# Altium PCB ife18_TS_AIL_Buck.PcbDoc
Units mm, origin at the board's own origin, x right, y up, seen from the top; angles counter-clockwise.
Board outline 32.3 x 21.59 mm, 2 copper layers (Top Layer, Bottom Layer); 12 components, 12 nets, 42 pads, 9 vias.
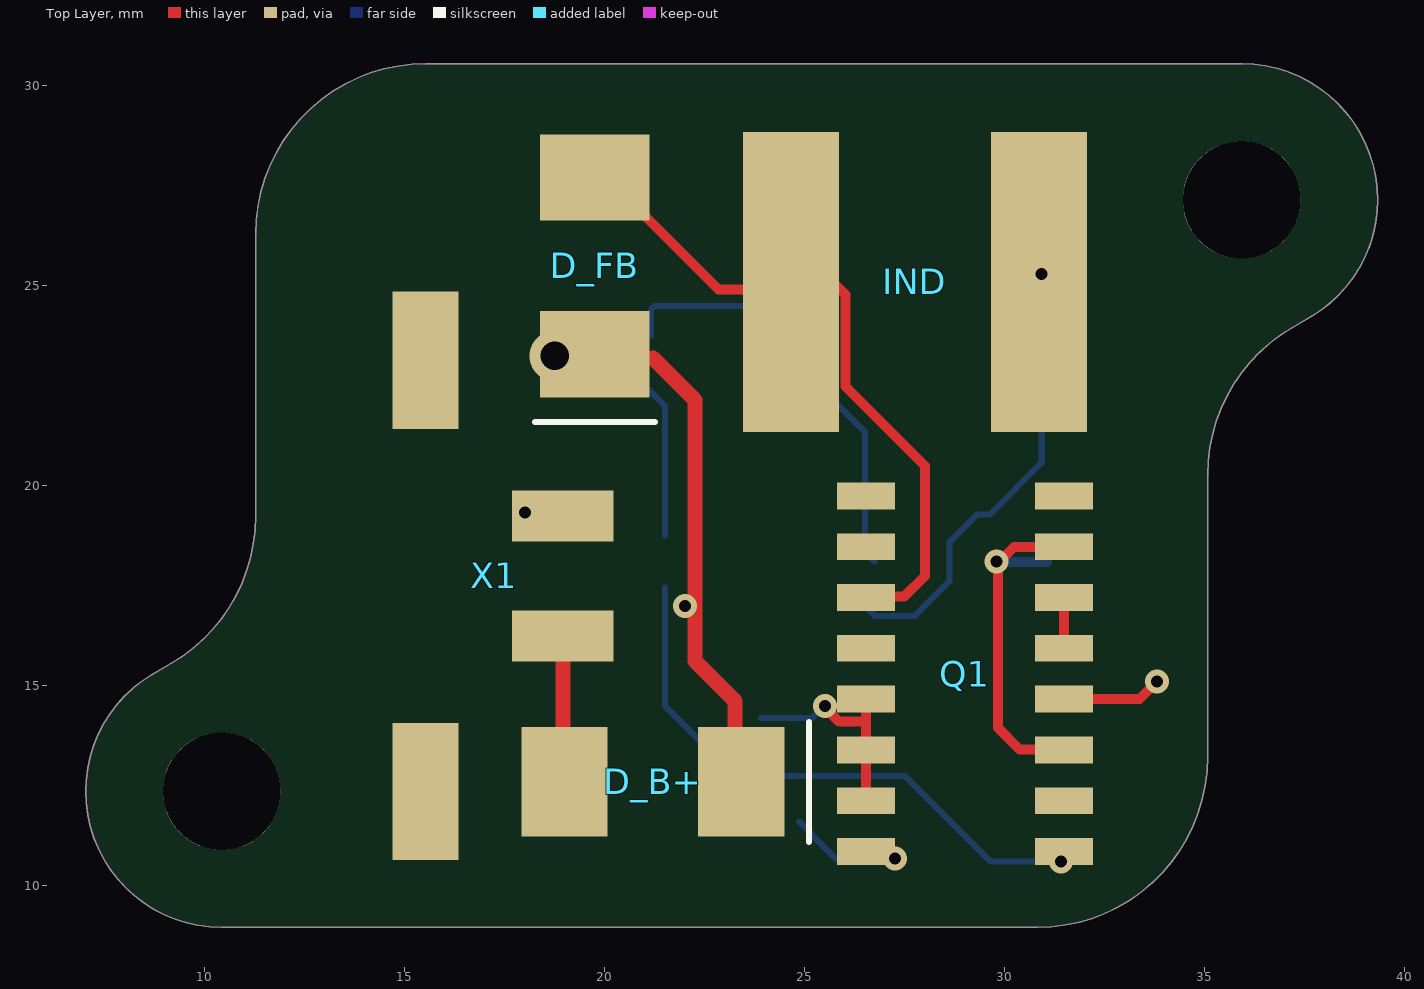
[diagram p0: Top Layer view]
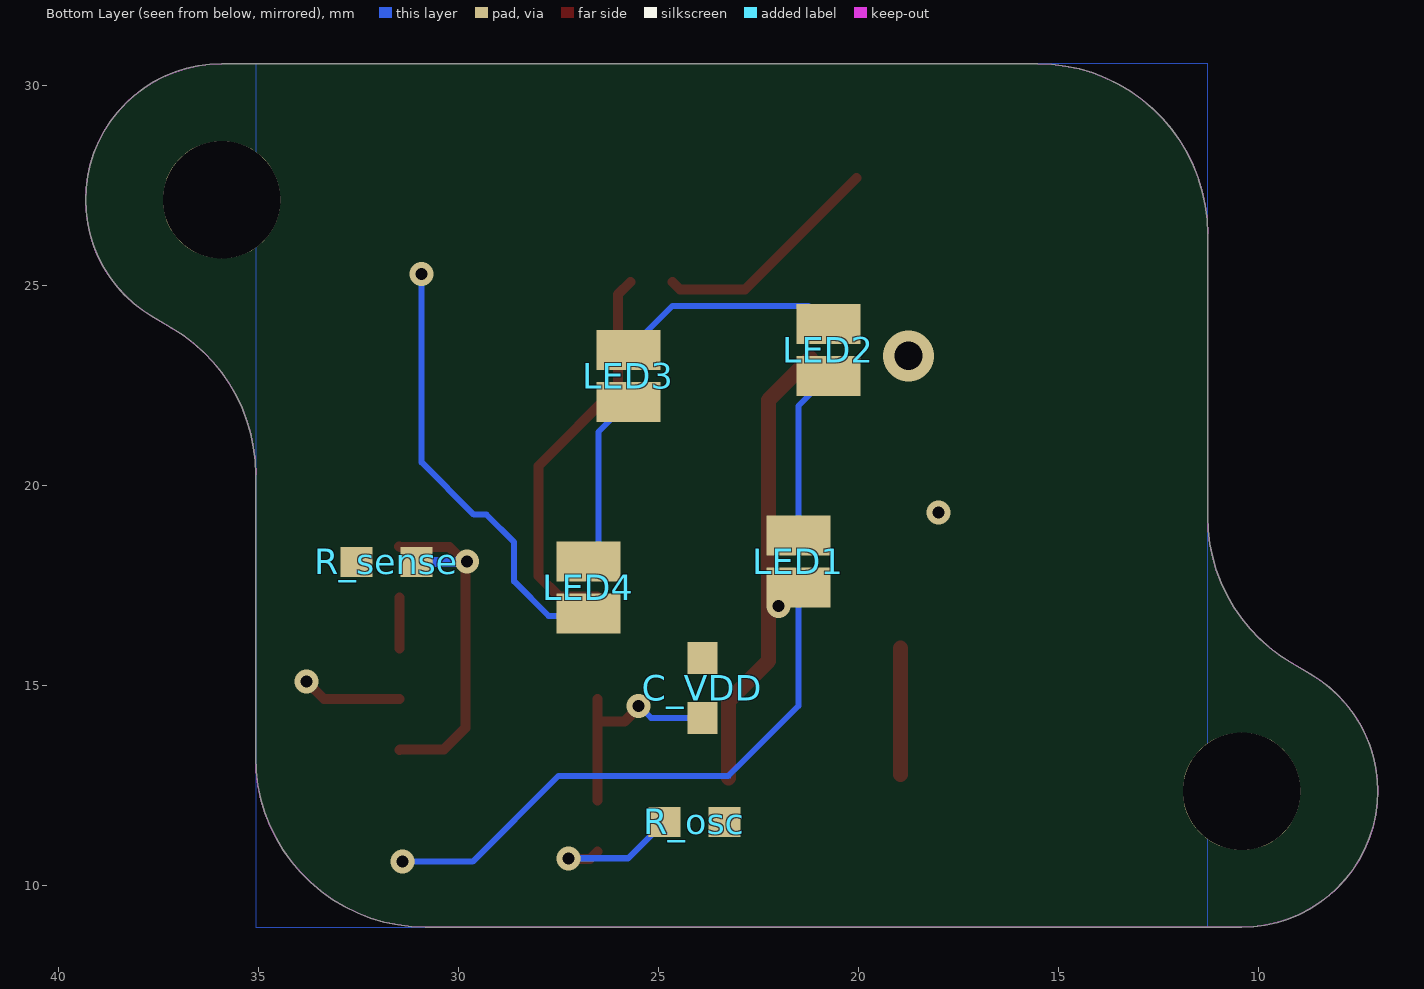
[diagram p1: Bottom Layer view, seen from below]
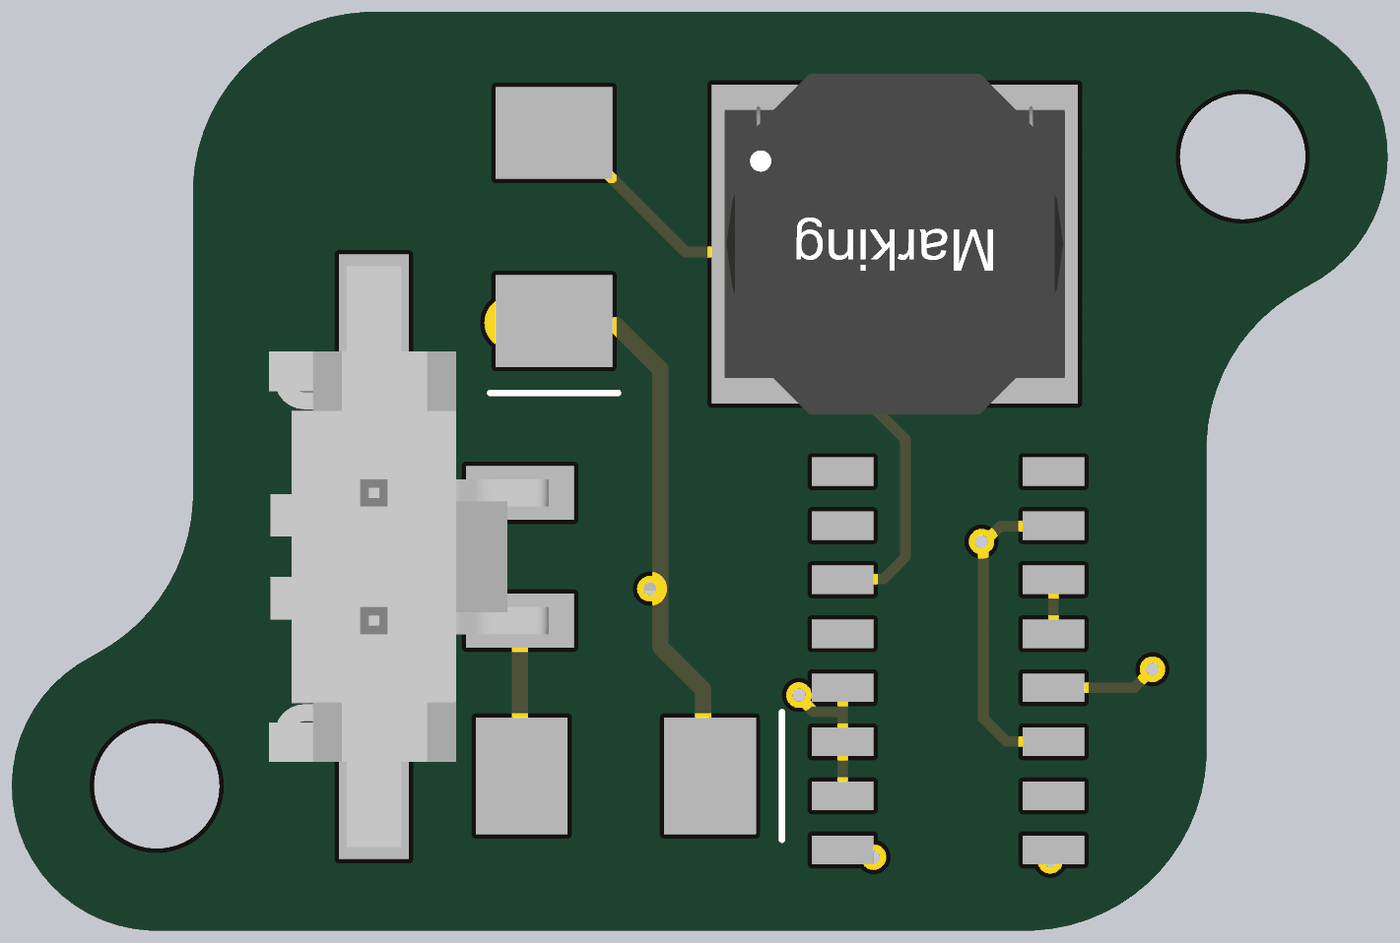
[diagram p2: 3D render of the assembled board from above, using the file's embedded part models]
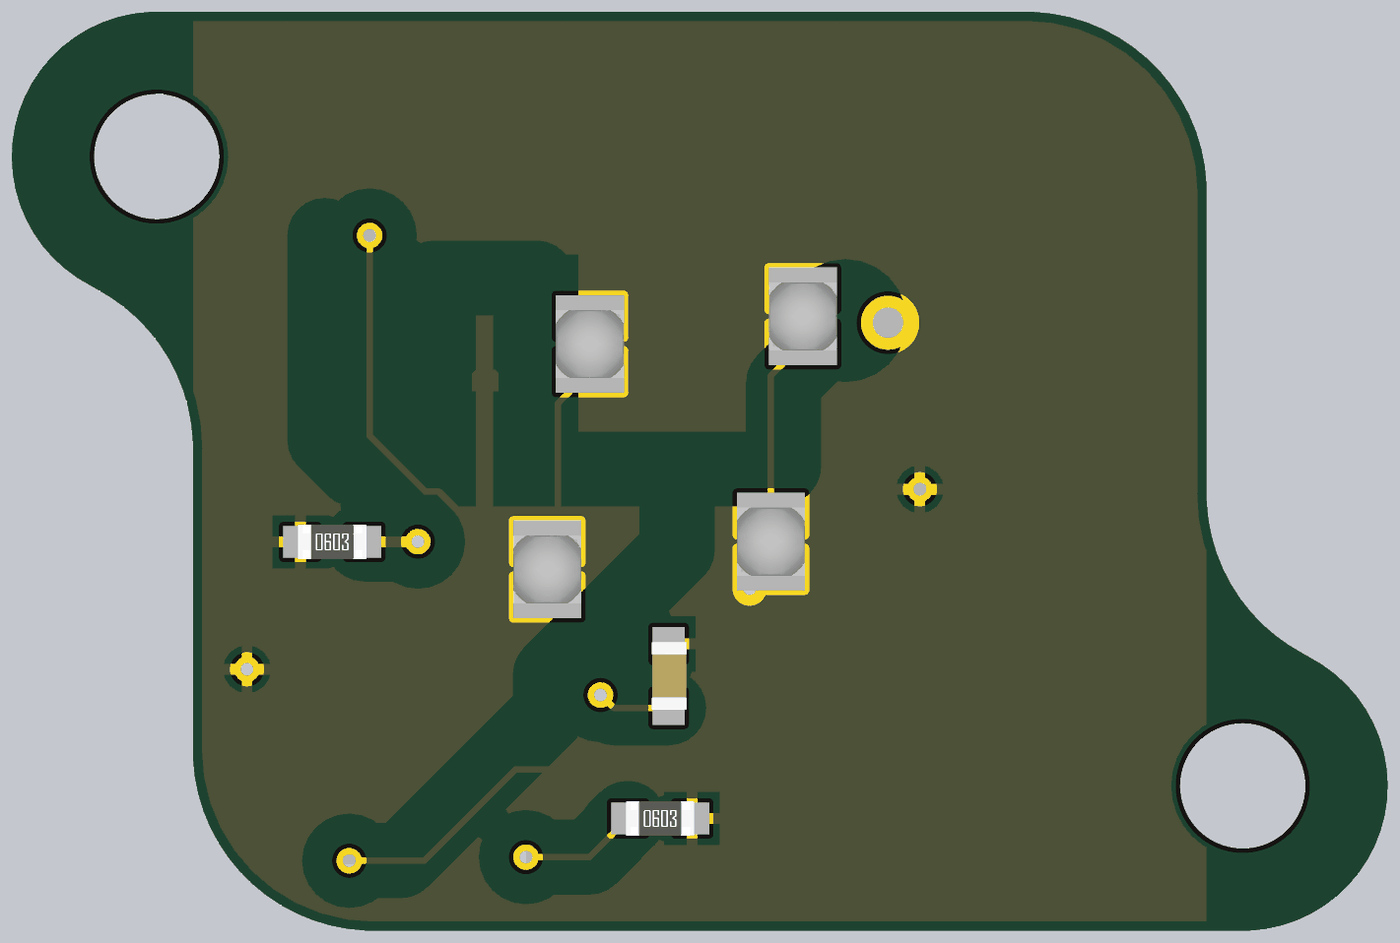
[diagram p3: 3D render of the assembled board from below, using the file's embedded part models]

## Layer stack, top to bottom
Top Solder: solder mask 0.0102, Solder Resist, Dk 3.5
Top Layer: signal copper 0.0356
Dielectric 1: dielectric 0.32, FR-4, Dk 4.8
Bottom Layer: signal copper 0.0356
Bottom Solder: solder mask 0.0102, Solder Resist, Dk 3.5

## Board outline
8.714,15.306 9.152,15.56 ccw(c7.02,19.236) 11.27,19.236 11.27,26.304 cw(c15.52,26.304) 15.52,30.554 35.92,30.554 cw(c35.92,27.154) 37.626,24.213 37.188,23.959 ccw(c39.32,20.283) 35.07,20.283 35.07,13.214 cw(c30.82,13.214) 30.82,8.964 10.42,8.964 cw(c10.42,12.364)

## Design rules (kind name [scope] priority, off if disabled: settings)
BoardOutlineClearance [All] p1: gap=0.2 ignorepadtopadclearanceinfootprint=FALSE
Clearance "Board Clearance" [(IsPad OR OnLayer('Keep-Out Layer'))] p1: gap=0.2 ignorepadtopadclearanceinfootprint=TRUE
Clearance [All] p2: gap=0.8 ignorepadtopadclearanceinfootprint=TRUE
PolygonConnect "Inductor Plane" [InNet('NetD_FB_A')] p1: connectstyle=Direct reliefconductorwidth=0.254 reliefentries=4 polygonreliefangle="90 Angle" airgapwidth=0.254
PolygonConnect Polygons [All] p2: connectstyle=Relief reliefconductorwidth=0.254 reliefentries=4 polygonreliefangle="90 Angle" airgapwidth=0.254
RoutingVias [All] p1: holewidth=0.3 width=0.6 viastyle="Through Hole" minholewidth=0.3 minwidth=0.6 maxholewidth=6.3 maxwidth=10
SolderMaskExpansion [All] p1: expansion=0.102
Width [All] p1: maxlimit=0.5 minlimit=0.152 preferedwidth=0.25
30 further rules are at their usual default settings.

## Classes and differential pairs
component class ife18_TS_AIL_Buck: D_B+ D_FB IND LED1 LED2 LED3 LED4 R_sense X1

## Components (designator, comment, footprint, x,y, rotation, side; value= is the part's Value field where it differs from the comment)
C_VDD "1u" CAP-0603 23.9,14.95 r270 bottom
D_B+ "40V" SMB 21.2,12.6 r180 top
D_FB "?" SMB 19.75,25.5 r90 top
IND "2.2mH" IND-8080 27.75,25.1 r180 top
LED1 "LED XQA Red" LED_XQARED 21.5,18.106 r90 bottom
LED2 "LED XQA Red" LED_XQARED 20.75,23.4 r90 bottom
LED3 "LED XQA Red" LED_XQARED 25.75,22.75 r270 bottom
LED4 "LED XQA Red" LED_XQARED 26.75,17.456 r270 bottom
Q1 "?" SO-16 29,15.306 r270 top
R_osc "1M" RES-0603 24.1,11.6 r180 bottom
R_sense "2" RES-0603 31.8,18.1 r180 bottom
X1 "Molex - Micro-Fit 3.0 Series connector,  3.00mm (0.118\") pitch header, 2 positions." 43650-0224 15.52,17.75 r270 top

## Footprints (in the part's own frame and the unit in brackets; to place one, negate y for a bottom-side part, rotate by r counter-clockwise, add the part's x,y. Pads: shape width x height; smd on the part's side, far side on the other; paste and mask are expansions set on the pad)
43650-0224 [mm]
  rect 1.27x2.54 smd: P$1(1.5,3.43) P$2(-1.5,3.43)
  rect 3.43x1.65 smd: TAB1(5.39,0) TAB2(-5.39,0)
  body extent -6.82,-2.47 6.83,4.1, height 9.95
CAP-0603 [mm]
  rect 0.8x0.75 smd: 1(-0.75,0) 2(0.75,0)
  body extent -0.8,-0.4 0.8,0.42, height 0.81
IND-8080 [mm]
  rect 2.4x7.5 smd: 1(-3.1,0) 2(3.1,0)
  body extent -4,-4 4,4, height 6.52
LED_XQARED [mm]
  rect 1x1.6 smd: A(-0.65,0) K(0.65,0)
  body extent -0.8,-0.8 0.8,0.8, height 1.56
RES-0603 [mm]
  rect 0.8x0.75 smd: 1(-0.75,0) 2(0.75,0)
  body extent -0.8,-0.4 0.8,0.4, height 0.44
SMB [mm]
  rect 2.159x2.743 smd: A(2.21,0) K(-2.21,0)
  silkscreen extent -3.9,-1.5 -3.9,1.5, body extent -2.79,-1.97 2.8,1.97, height 2.5
SO-16 [mm]
  rect 0.67x1.45 smd: 1(-4.445,-2.475) 2(-3.175,-2.475) 3(-1.905,-2.475) 4(-0.635,-2.475) 5(0.635,-2.475) 6(1.905,-2.475) 7(3.175,-2.475) 8(4.445,-2.475) 9(4.445,2.475) 10(3.175,2.475) 11(1.905,2.475) 12(0.635,2.475) 13(-0.635,2.475) 14(-1.905,2.475) 15(-3.175,2.475) 16(-4.445,2.475)
  body extent -4.98,-3.07 4.99,3.07, height 1.78

## Part data
C_VDD: library part CAP-0603
D_B+ D_FB: library part DIODE-SMB
IND: library part IND-8080
LED1 LED2 LED3 LED4: library part LED_XQARED
Q1: library part IC-SO16_AL9901_1
R_osc R_sense: library part RES-0603
X1: library part POS2_MF43650-0224, Package=43650-0224, DeviceName=43650-0224, DeviceSetName=HEADER_POS2_?, GateName_1=G$1, LibraryName="MOLEX Micro-Fit", SymbolName_1=HEADER_POS2

## Free pads (board coordinates)
  round 2.946 hole 2.946 unplated: H1(10.42,12.364) H2(35.92,27.154)

## Via types
v1: diameter 0.6, hole 0.3, Top Layer to Bottom Layer, 8 vias
v2: diameter 1.27, hole 0.711, Top Layer to Bottom Layer, 1 vias

## Nets (pads, with @x,y where several pads share a name; then routed paths per layer and width w, separated by ;. In a path a pad name is that pad's centre, name@x,y a point inside that pad or via, vN(x,y) a via of type N, cw(c..) or ccw(c..) an arc to the next point about the centre after c; other vN are vias at no path point)
GND: C_VDD.1 Q1.12 R_osc.2 R_sense.1 X1.P$2 | length 2.5
  Top Layer w0.25: Q1.12 33.365,14.671 v1(33.8,15.106)
  other v1: 18,19.337
NetC_VDD_2: C_VDD.2 Q1.5 Q1.6 Q1.7 | length 5.5
  Top Layer w0.25: v1(25.5,14.5) 25.5,14.459 25.853,14.106 26.525,14.106 ; Q1.7 Q1.6 26.525,14.106 ; Q1.5 26.525,14.106
  Bottom Layer w0.152: C_VDD.2 25.187,14.2 25.487,14.5 v1(25.5,14.5)
NetD_B+_A: D_B+.A X1.P$1 | length 3.2
  Top Layer w0.381: D_B+.A@18.95,12.785 X1.P$1@18.95,15.941
NetD_B+_K: D_B+.K D_FB.K LED1.A Q1.9 | length 25.8
  Top Layer w0.381: 21.2,23.2 22.25,22.15 22.25,15.625 23.25,14.625 D_B+.K@23.25,12.7
  Bottom Layer w0.152: LED1.A 21.5,14.5 23.25,12.75 27.5,12.75 29.644,10.606 v1(31.4,10.606)
  other v1: 22,17
  other v2: 18.75,23.25
NetD_FB_A: D_FB.A IND.2 Q1.3 | length 15.8
  Top Layer w0.25: D_FB.A@20.05,27.7 22.84,24.91 24.46,24.91 IND.2 ; IND.2@25.7,25.1 26.017,24.783 26.017,22.483 28,20.5 28,17.75 27.479,17.229 26.543,17.229 Q1.3
NetIND_1: IND.1 LED4.K | length 11.4
  Bottom Layer w0.152: LED4.K@26.5,17 26.75,16.75 27.75,16.75 28.611,17.611 28.611,18.593 29.3,19.282 29.617,19.282 30.921,20.586 v1(30.921,25.3)
NetLED1_K: LED1.K LED2.A | length 4.3
  Bottom Layer w0.152: LED2.A 21.5,22 LED1.K
NetLED2_K: LED2.K LED3.A | length 5.7
  Bottom Layer w0.152: LED2.K@21.15,23.75 21.15,24.4 21.25,24.5 24.65,24.5 LED3.A
NetLED3_K: LED3.K LED4.A | length 4.4
  Bottom Layer w0.152: LED3.K 26.5,21.35 26.5,18.356 LED4.A
NetQ1_8: Q1.8 R_osc.1 | length 3.8
  Top Layer w0.25: Q1.8 26.713,10.673 27.333,10.673 27.315,10.69 v1(27.25,10.69)
  Bottom Layer w0.152: R_osc.1 24.875,11.6 25.174,11.301 25.174,11.276 25.76,10.69 v1(27.25,10.69)
NetQ1_11: Q1.11 Q1.15 R_sense.2 | length 9.1
  Top Layer w0.25: v1(29.787,18.106) v1@29.825,18.067 ; Q1.11 31.465,13.411 30.367,13.411 29.825,13.952 v1@29.825,18.067 ; Q1.15@31.485,18.491 Q1.15 31.465,18.471 30.228,18.471 v1@29.825,18.067
  Bottom Layer w0.25: v1@29.787,18.1 R_sense.2
NetQ1_13: Q1.13 Q1.14 | length 1.3
  Top Layer w0.25: Q1.13 Q1.14
pads on no net: Q1.1 Q1.2 Q1.4 Q1.10 Q1.16 X1.TAB1 X1.TAB2

## Polygon pours and split planes (outlines as drawn)
GND on Bottom Layer "Bottom Layer-No Net" (solid, remove dead copper, shelved, pour order 2): 11.27,30.554 35.07,30.554 35.07,8.964 11.27,8.964

## Keep-outs
Keep-Out Layer:
  the board outline again, w0.02

## Silkscreen, mask and mechanical layers (free items; w line width, h text height)
Measurements (Mech8):
  lines w0.2: 50,50 50,64 64,64 64,50 50,50

## Dimensions
35.92,30.554 to 30.82,8.964 on Measurements (Mech8)
11.27,19.236 to 35.07,20.283 on Measurements (Mech8)